# Altium PCB Copy of Mini_MP3_black_uart_v2.0.PcbDoc
Units mil, origin at the board's own origin, x right, y up, seen from the top; angles counter-clockwise.
Board outline 1270.03 x 1060.03 mil, 2 copper layers (Top Layer, Bottom Layer); 5 components, 7 nets, 24 pads, 0 vias.
Unrouted connection lines stored in the file: 3.
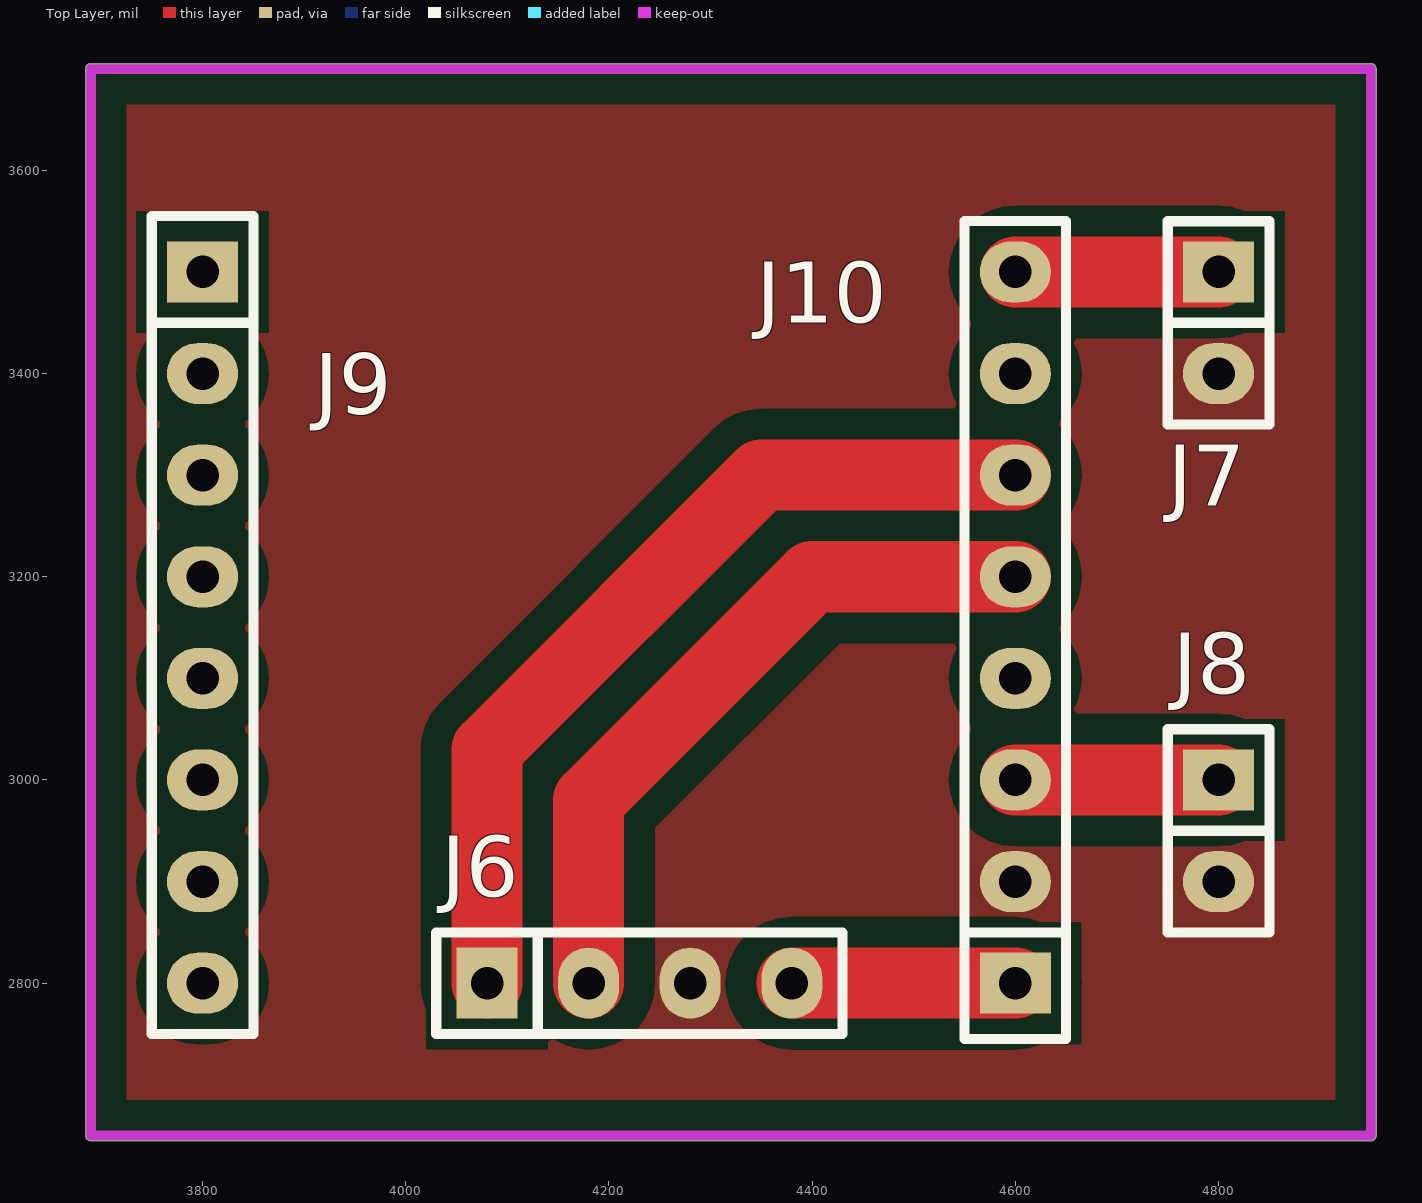
[diagram p0: Top Layer view]
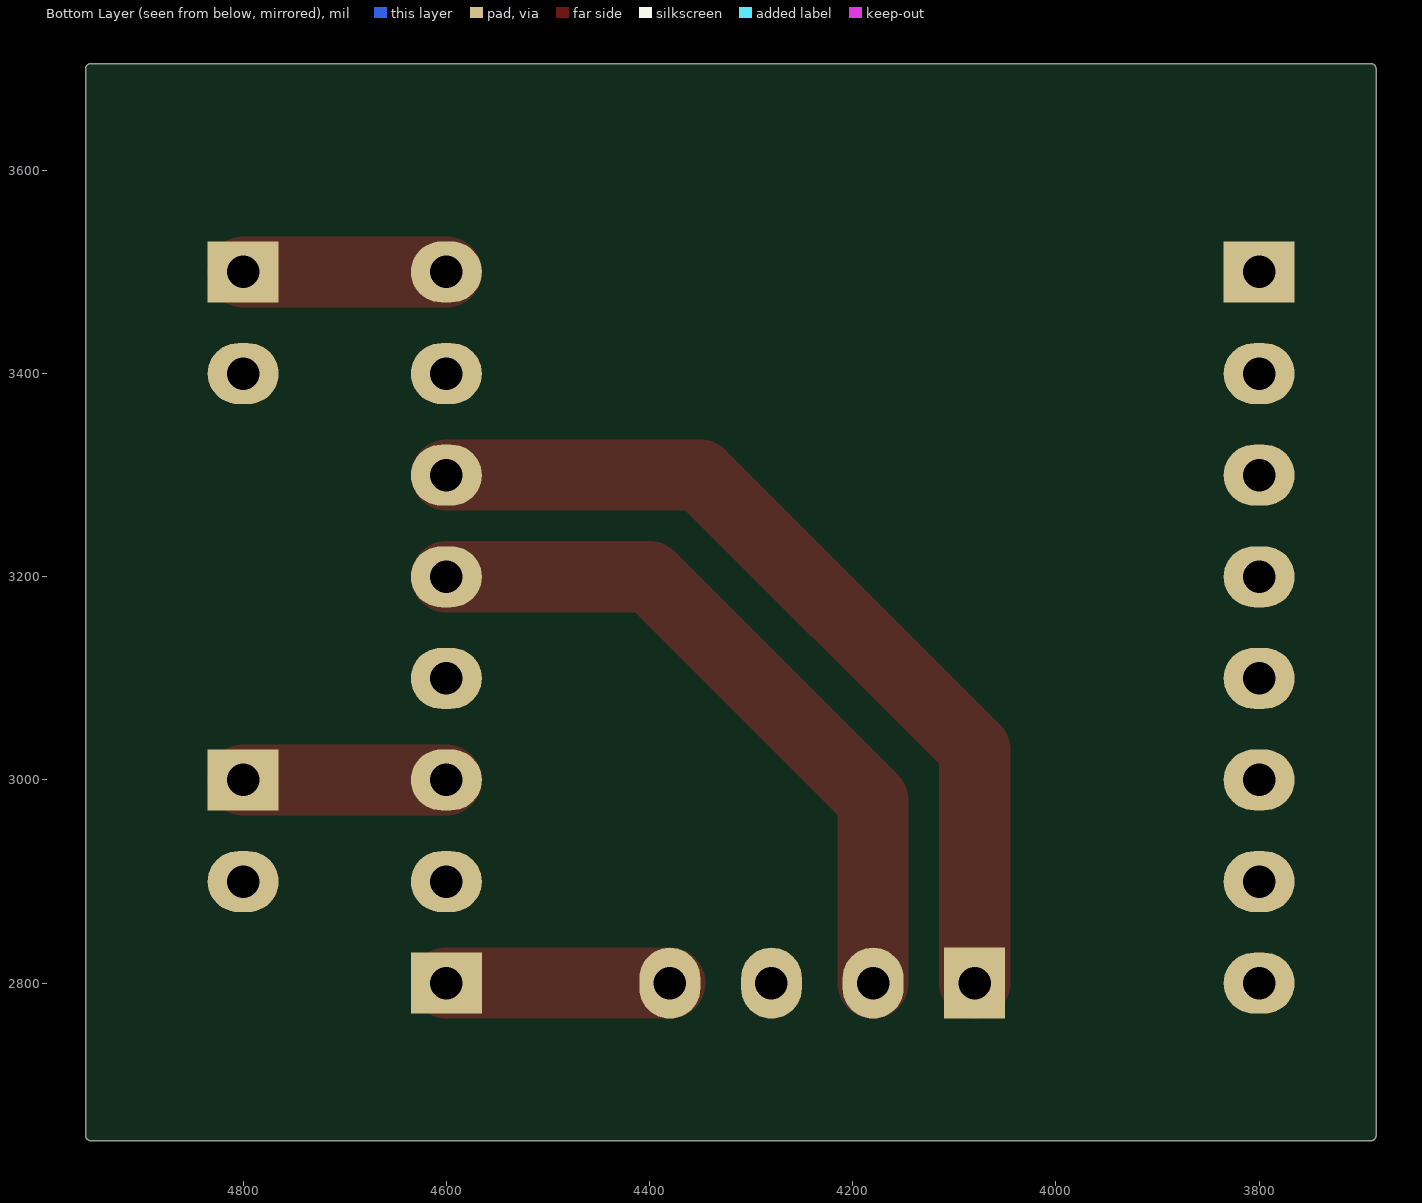
[diagram p1: Bottom Layer view, seen from below]

## Layer stack, top to bottom
Top Solder: solder mask 0.4, Solder Resist, Dk 3.5
Top Layer: signal copper 1.4
Dielectric 1: dielectric 12.6, FR-4, Dk 4.8
Bottom Layer: signal copper 1.4
Bottom Solder: solder mask 0.4, Solder Resist, Dk 3.5

## Board outline
3684.99,2650 ccw(c3690,2650) 3690,2644.99 4950,2644.99 ccw(c4950,2650) 4955.02,2650 4955.02,3700 ccw(c4950,3700) 4950,3705.01 3690,3705.01 ccw(c3690,3700) 3684.99,3700

## Design rules (kind name [scope] priority, off if disabled: settings)
Clearance [All] p1: gap=30 ignorepadtopadclearanceinfootprint=FALSE
PolygonConnect [All] p1: connectstyle=Direct reliefconductorwidth=10 reliefentries=4 polygonreliefangle="90 Angle" airgapwidth=10
RoutingVias [All] p1: holewidth=28 width=50 viastyle="Through Hole" minholewidth=28 minwidth=50 maxholewidth=28 maxwidth=50
SolderMaskExpansion [All] p1: expansion=4 istentingtop=FALSE
Width [All] p1: maxlimit=70 minlimit=10 preferedwidth=10 minimp=50.000000 maximp=50.000000 favimp=50.000000
30 further rules are at their usual default settings.

## Components (designator, comment, footprint, x,y, rotation, side; value= is the part's Value field where it differs from the comment)
J6 "Female HDR1X4" Fe-HDR1X4/2.54-S 4080,2800 r90 top
J7 "Female HDR1X2" Fe-HDR1X2/2.54-S 4800,3500 r270 top
J8 "Female HDR1X2" Fe-HDR1X2/2.54-S 4800,3000 r270 top
J9 "Female HDR1X8" Fe-HDR1X8/2.54-S 3800,3500 r0 top
J10 "Female HDR1X8" Fe-HDR1X8/2.54-S 4600,2800 r180 top

## Footprints (in the part's own frame and the unit in brackets; to place one, negate y for a bottom-side part, rotate by r counter-clockwise, add the part's x,y. Pads: shape width x height; smd on the part's side, far side on the other; paste and mask are expansions set on the pad)
Fe-HDR1X2/2.54-S [mil] "Connector; Header; 2x2 Position"
  rect 60x70 hole 32: 1(0,0)
  oval 60x70 hole 32: 2(100,0)
  silkscreen extent -50,-50 150,50, body extent -55,-48 155,50, height 335
Fe-HDR1X4/2.54-S [mil]
  rect 70x60 hole 32: 1(0,0)
  oval 70x60 hole 32: 2(0,-100) 3(0,-200) 4(0,-300)
  silkscreen extent -50,-350 50,50, body extent -44,-355 54,55, height 335
Fe-HDR1X8/2.54-S [mil]
  rect 70x60 hole 32: 1(0,0)
  oval 70x60 hole 32: 2(0,-100) 3(0,-200) 4(0,-300) 5(0,-400) 6(0,-500) 7(0,-600) 8(0,-700)
  silkscreen extent -50,-750 50,55, body extent -49,-755 49,55, height 126

## Nets (pads, with @x,y where several pads share a name; then routed paths per layer and width w, separated by ;. In a path a pad name is that pad's centre, name@x,y a point inside that pad or via, vN(x,y) a via of type N, cw(c..) or ccw(c..) an arc to the next point about the centre after c; other vN are vias at no path point)
3V3: J8.1 J10.3 | length 200
  Top Layer w70: J10.3 J8.1
+5: J6.4 J10.1 | length 220
  Top Layer w70: J6.4 J10.1
DL: J7.1 J10.8 | length 200
  Top Layer w70: J10.8 J7.1
drive: 
GND: J6.3 J7.2 J8.2 J10.2
RX: J6.2 J10.5 | length 724.7
  Top Layer w10: J10.5@4570.43,3190.43 4590.43,3190.43 J10.5
  Top Layer w70: J6.2 4180,2980 4400,3200 J10.5
TX: J6.1 J10.6 | length 861.8
  Top Layer w70: J6.1 4080,3030 4350,3300 J10.6
pads on no net: J9.1 J9.2 J9.3 J9.4 J9.5 J9.6 J9.7 J9.8 J10.4 J10.7

## Polygon pours and split planes (outlines as drawn)
GND on Top Layer "NONET_L-01_P-001" (solid, remove dead copper, pour order 1): 3690,3700 4950,3700 4950,2650 3690,2650
no net on Top Layer "NONET_L-01_P-001" (solid, pour order 0): 3690,3640

## Keep-outs
Top Layer:
  lines w10: 3690,2650 4950,2650 4950,3700 3690,3700 3690,3590 3690,2650